# Altium PCB SSOP28.PcbDoc
Units mil, origin at the board's own origin, x right, y up, seen from the top; angles counter-clockwise.
Board outline 750 x 940 mil, 2 copper layers (Top Layer, Bottom Layer); 3 components, 142 nets, 56 pads, 0 vias.
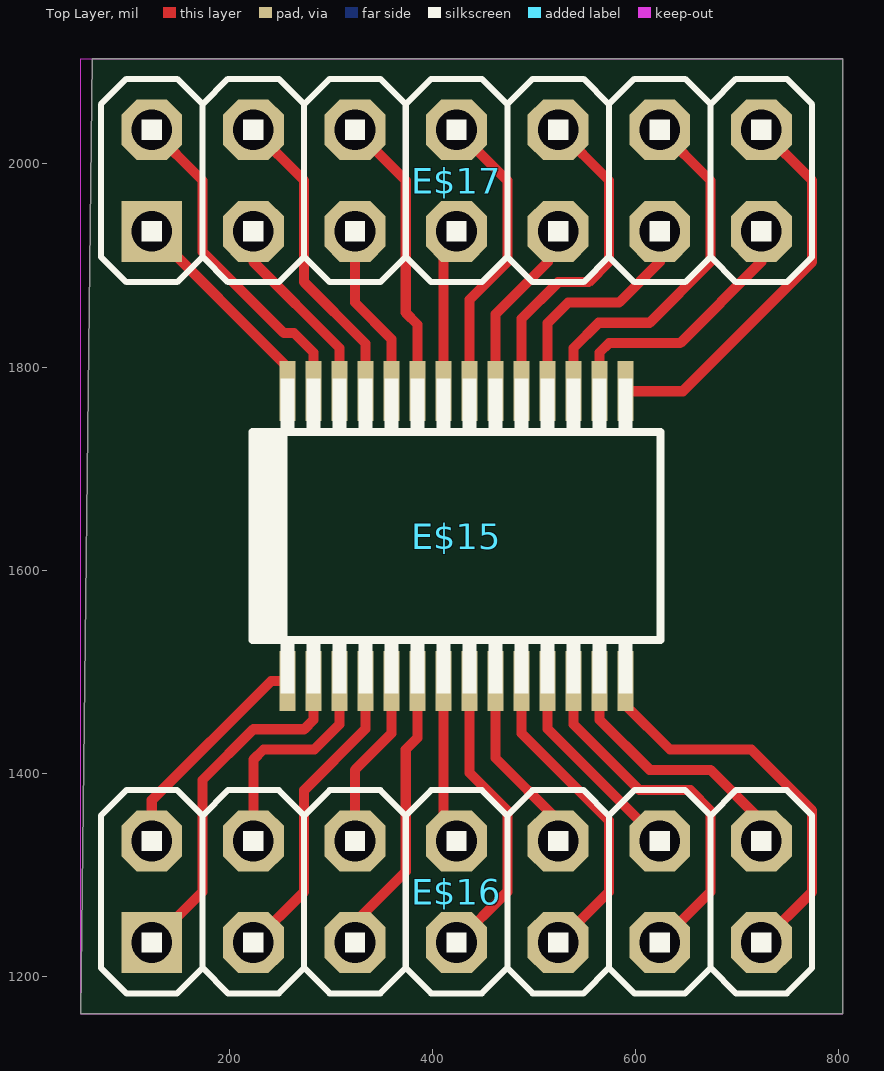
[diagram p0: Top Layer view]
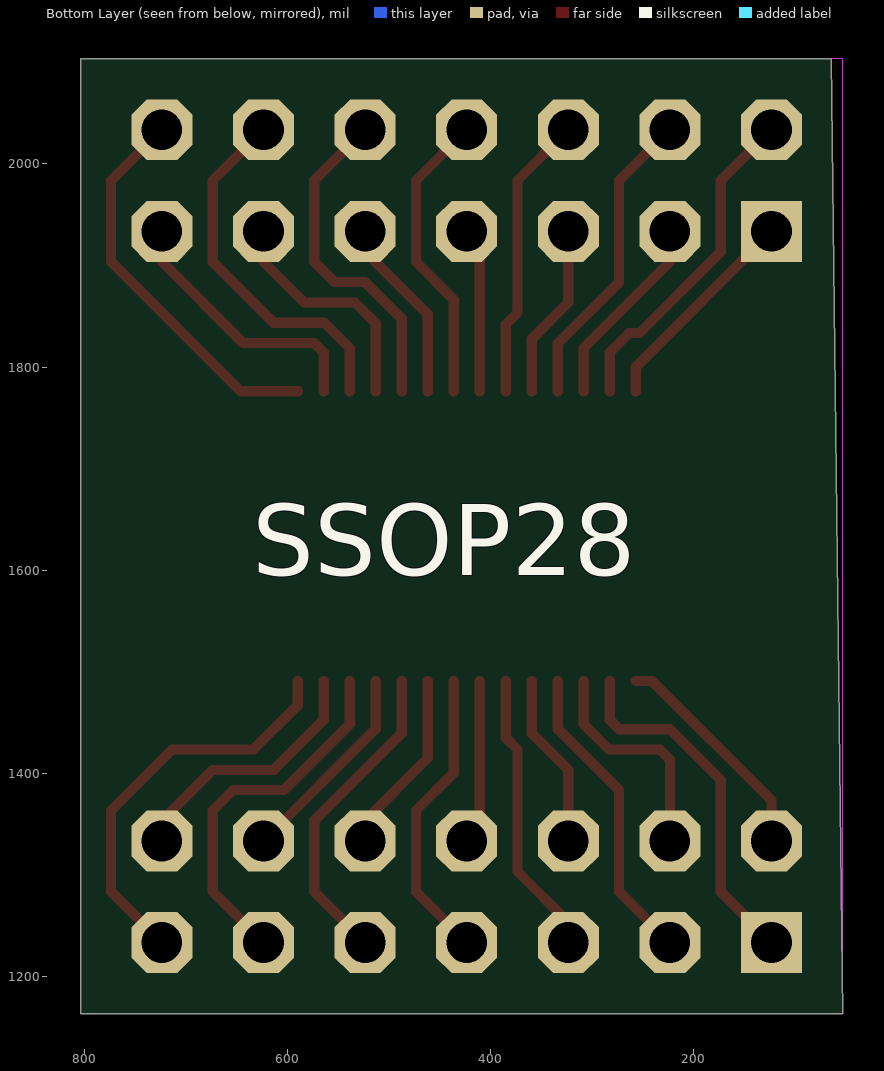
[diagram p1: Bottom Layer view, seen from below]

## Layer stack, top to bottom
Top Layer: signal copper 1.4
Dielectric: dielectric 12.6, FR-4, Dk 4.8
Bottom Layer: signal copper 1.4

## Board outline
65,2103.67 803.67,2103.67 803.67,1163.67 53.67,1163.67

## Design rules (kind name [scope] priority, off if disabled: settings)
Clearance [All] p1: gap=10
PolygonConnect [All] p1: connectstyle=Relief reliefconductorwidth=10 reliefentries=4 polygonreliefangle="90 Angle"
RoutingVias [All] p1: holewidth=28 width=50 viastyle="Through Hole" minholewidth=28 minwidth=50 maxholewidth=28 maxwidth=50
SilkscreenOverComponentPads [All] p1: minsilkscreentomaskgap=10
SolderMaskExpansion [All] p1: expansion=4
Width [All] p1: maxlimit=10 minlimit=10 preferedwidth=10
27 further rules are at their usual default settings.

## Components (designator, comment, footprint, x,y, rotation, side; value= is the part's Value field where it differs from the comment)
E$15 "Comment" SSOP28 423.67,1633.67 r0 top
E$16 "Comment" 2X07 423.67,1283.67 r0 top
E$17 "Comment" 2X07 423.67,1983.67 r0 top

## Footprints (in the part's own frame and the unit in brackets; to place one, negate y for a bottom-side part, rotate by r counter-clockwise, add the part's x,y. Pads: shape width x height; smd on the part's side, far side on the other; paste and mask are expansions set on the pad)
2X07 [mil]
  rect 60x60 hole 40: 1(-300,-50)
  oct 60x60 hole 40: 2(-300,50) 3(-200,-50) 4(-200,50) 5(-100,-50) 6(-100,50) 7(0,-50) 8(0,50) 9(100,-50) 10(100,50) 11(200,-50) 12(200,50) 13(300,-50) 14(300,50)
  silkscreen extent -350,-100 350,100
SSOP28 [mm]
  rect 0.4x1.5 smd: 1(-4.225,-3.625) 2(-3.575,-3.625) 3(-2.925,-3.625) 4(-2.275,-3.625) 5(-1.625,-3.625) 6(-0.975,-3.625) 7(-0.325,-3.625) 8(0.325,-3.625) 9(0.975,-3.625) 10(1.625,-3.625) 11(2.275,-3.625) 12(2.925,-3.625) 13(3.575,-3.625) 14(4.225,-3.625) 15(4.225,3.625) 16(3.575,3.625) 17(2.925,3.625) 18(2.275,3.625) 19(1.625,3.625) 20(0.975,3.625) 21(0.325,3.625) 22(-0.325,3.625) 23(-0.975,3.625) 24(-1.625,3.625) 25(-2.275,3.625) 26(-2.925,3.625) 27(-3.575,3.625) 28(-4.225,3.625)
  silkscreen extent -5.2,-3.94 5.1,3.94

## Nets (pads, with @x,y where several pads share a name; then routed paths per layer and width w, separated by ;. In a path a pad name is that pad's centre, name@x,y a point inside that pad or via, vN(x,y) a via of type N, cw(c..) or ccw(c..) an arc to the next point about the centre after c; other vN are vias at no path point)
N$1: 
N$2: 
N$3: 
N$4: 
N$5: 
N$6: 
N$7: 
N$8: 
N$9: 
N$10: 
N$11: 
N$12: 
N$13: 
N$14: 
N$15: 
N$16: 
N$17: 
N$18: 
N$19: 
N$20: 
N$21: 
N$22: 
N$23: 
N$24: 
N$25: 
N$26: 
N$27: 
N$28: 
N$29: 
N$30: 
N$31: 
N$32: 
N$33: 
N$34: 
N$35: 
N$36: 
N$37: 
N$38: 
N$39: 
N$40: 
N$41: 
N$42: 
N$43: 
N$44: 
S$1: 
S$2: 
S$3: 
S$4: 
S$5: 
S$6: 
S$7: 
S$8: 
S$9: 
S$10: 
S$11: 
S$12: 
S$13: 
S$14: 
S$15: 
S$16: 
S$17: 
S$18: 
S$19: 
S$20: 
S$21: 
S$22: 
S$23: 
S$24: 
S$25: 
S$26: 
S$27: 
S$28: 
S$29: 
S$30: 
S$31: 
S$32: 
S$33: 
S$34: 
S$35: 
S$36: 
S$37: 
S$38: 
S$39: 
S$40: 
S$41: 
S$42: 
S$43: 
S$44: 
S$45: 
S$46: 
S$47: 
S$48: 
S$49: 
S$50: 
S$51: 
S$52: 
S$53: 
S$54: 
S$55: 
S$56: 
S$57: 
S$58: 
S$59: 
S$60: 
S$61: 
S$62: 
S$63: 
S$64: 
S$65: 
S$66: 
S$67: 
S$68: 
S$69: 
S$70: 
S$71: E$15.1 E$16.2 | length 222.2
  Top Layer w10: E$16.2 123.67,1373.67 240.95,1490.95 E$15.1
S$72: E$15.2 E$16.1 | length 352.5
  Top Layer w10: E$16.1 173.67,1283.67 173.67,1393.67 223.67,1443.67 273.67,1443.67 282.92,1452.92 E$15.2
S$73: E$15.3 E$16.4 | length 221.7
  Top Layer w10: E$16.4 223.67,1413.67 233.67,1423.67 283.67,1423.67 308.51,1448.51 E$15.3
S$74: E$15.4 E$16.3 | length 303
  Top Layer w10: E$16.3 273.67,1283.67 273.67,1383.67 334.1,1444.1 E$15.4
S$75: E$15.5 E$16.6 | length 172.2
  Top Layer w10: E$16.6 323.67,1403.67 359.69,1439.69 E$15.5
S$76: E$15.6 E$16.5 | length 282.8
  Top Layer w10: E$16.5 323.67,1253.67 373.67,1303.67 373.67,1423.67 385.28,1435.28 E$15.6
S$77: E$15.7 E$16.8 | length 162.6
  Top Layer w10: E$15.7 410.87,1346.46 E$16.8
S$78: E$15.8 E$16.7 | length 293.4
  Top Layer w10: E$16.7 473.67,1283.67 473.67,1363.67 436.46,1400.87 E$15.8
S$79: E$15.9 E$16.10 | length 182.8
  Top Layer w10: E$15.9 462.05,1415.28 523.67,1353.67 E$16.10
S$80: E$15.10 E$16.9 | length 313.6
  Top Layer w10: E$15.10 487.64,1439.69 573.67,1353.67 573.67,1283.67 E$16.9
S$81: E$15.11 E$16.12 | length 203
  Top Layer w10: E$15.11 513.23,1444.1 E$16.12
S$82: E$15.12 E$16.11 | length 363.1
  Top Layer w10: E$15.12 538.82,1448.51 603.67,1383.67 653.67,1383.67 673.67,1363.67 673.67,1283.67 E$16.11
S$83: E$15.13 E$16.14 | length 258.4
  Top Layer w10: E$15.13 564.41,1452.92 613.67,1403.67 673.67,1403.67 723.67,1353.67 E$16.14
S$84: E$15.14 E$16.13 | length 400.9
  Top Layer w10: E$15.14 590,1467.33 633.67,1423.67 713.67,1423.67 773.67,1363.67 773.67,1283.67 E$16.13
S$85: E$15.28 E$17.1 | length 212.7
  Top Layer w10: E$17.1 257.33,1800.01 E$15.28
S$86: E$15.27 E$17.2 | length 329.1
  Top Layer w10: E$17.2 173.67,1983.67 173.67,1913.67 253.67,1833.67 263.67,1833.67 282.92,1814.41 E$15.27
S$87: E$15.26 E$17.3 | length 192.4
  Top Layer w10: E$17.3 223.67,1903.67 308.51,1818.82 E$15.26
S$88: E$15.25 E$17.4 | length 303
  Top Layer w10: E$17.4 273.67,1983.67 273.67,1883.67 334.1,1823.23 E$15.25
S$89: E$15.24 E$17.5 | length 172.2
  Top Layer w10: E$17.5 323.67,1863.67 359.69,1827.64 E$15.24
S$90: E$15.23 E$17.6 | length 282.8
  Top Layer w10: E$17.6 373.67,1983.67 373.67,1853.67 385.28,1842.05 E$15.23
S$91: E$15.22 E$17.7 | length 162.6
  Top Layer w10: E$15.22 410.87,1920.87 E$17.7
S$92: E$15.21 E$17.8 | length 293.4
  Top Layer w10: E$17.8 473.67,1983.67 473.67,1903.67 436.46,1866.46 E$15.21
S$93: E$15.20 E$17.9 | length 182.8
  Top Layer w10: E$15.20 462.05,1852.05 513.67,1903.67 513.67,1923.67 E$17.9
S$94: E$15.19 E$17.10 | length 331.2
  Top Layer w10: E$15.19 487.64,1847.64 523.67,1883.67 553.67,1883.67 573.67,1903.67 573.67,1983.67 E$17.10
S$95: E$15.18 E$17.11 | length 232.3
  Top Layer w10: E$15.18 513.23,1843.23 533.67,1863.67 583.67,1863.67 623.67,1903.67 E$17.11
S$96: E$15.17 E$17.12 | length 363.1
  Top Layer w10: E$15.17 538.82,1818.82 563.67,1843.67 613.67,1843.67 673.67,1903.67 673.67,1983.67 E$17.12
S$97: E$15.16 E$17.13 | length 264.3
  Top Layer w10: E$15.16 564.41,1814.41 573.67,1823.67 643.67,1823.67 723.67,1903.67 E$17.13
S$98: E$15.15 E$17.14 | length 387.1
  Top Layer w10: E$15.15 646.38,1776.38 773.67,1903.67 773.67,1983.67 E$17.14

## Keep-outs
Keep-Out Layer:
  lines w0.31: 53.67,1163.67 53.67,2103.67 803.67,2103.67 803.67,1163.67 53.67,1163.67

## Silkscreen, mask and mechanical layers (free items; w line width, h text height)
Bottom Overlay:
  text "SSOP28" at 635,1595 h70